# EAGLE board tentacle_module (EAGLE 7.1.0)
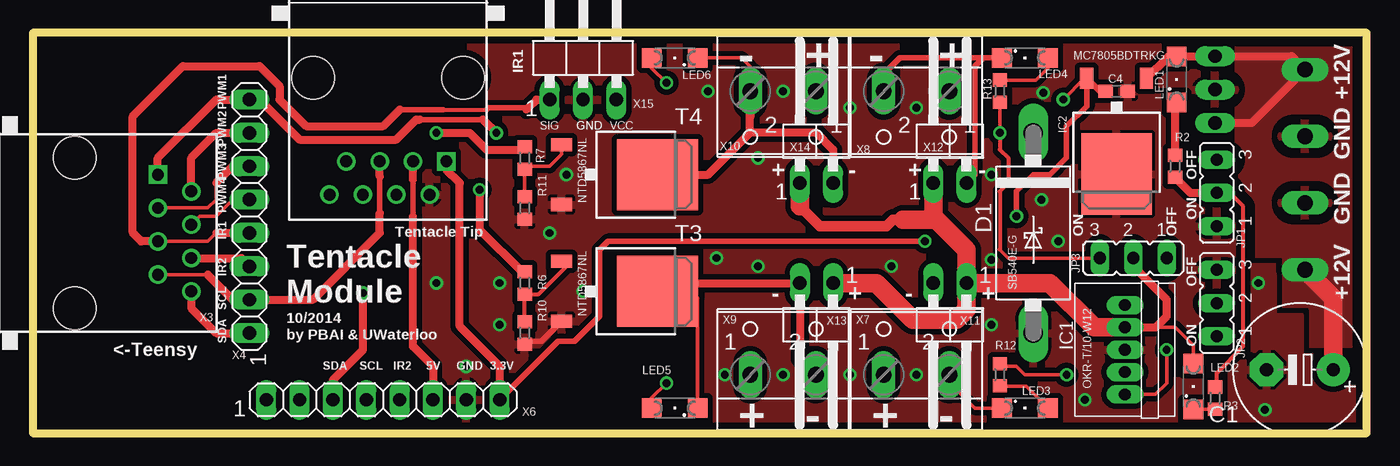
[diagram p0: board, top side]
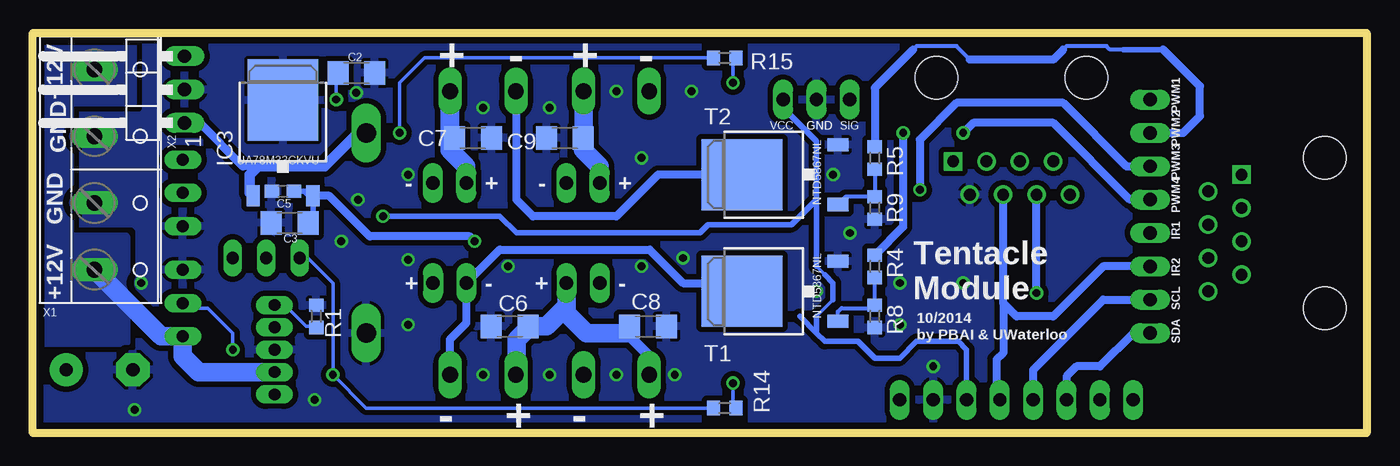
[diagram p1: board, bottom side, seen from below]

Size 101.6 x 30.48 mm. Coordinates in mm from the lower left corner, seen from the top.
Outline: 0,0 101.6,0 101.6,30.48 0,30.48 0,0
Copper layers (1*16): Top 0.035mm / dielectric 1.5mm / Bottom 0.035mm
Design rules "design_rule_settings *": minimum track width 10mil, minimum drill 20mil, track to track 10mil, track to pad 10mil, pad to pad 10mil, via to via 10mil, smd to smd 10mil, copper to edge 20mil, drill to drill 10mil, minimum pad ring 10mil, minimum via ring 8mil, stop-mask expansion 4mil, vias tented up to drill 0mil, thermal gap 10mil

## Footprints (pad centres in the part's own frame; a part is rotated, then mirrored left to right if it is on the bottom)
E5-10,5 = drill 1.016 pad 2.54: + -2.54,0 | drill 1.016 pad 2.54 octagon: - 2.54,0
C1206 = smd 1.6 x 1.8: 1 -1.4,0; 2 1.4,0
C0603 = smd 1.1 x 1: 1 -0.85,0; 2 0.85,0
DO201T15 = drill 1.499 long: A 7.62,0; C -7.62,0
OKR-C90 = drill 0.9 long: GND 0,0; ON/OFF 3.404,0; TRIM -3.404,0; VIN 1.702,0; VOUT -1.702,0
DPACK_3 = smd 1 x 1.6: 1 -2.28,-4.8; 3 2.28,-4.8 | smd 5.4 x 6.2: 4 0,2.5
DPACK = smd 1 x 1.6: 1 -2.28,-4.8; 3 2.28,-4.8 | smd 5.4 x 6.2: 2 0,2.5
JP2 = drill 0.914 long: 1 -2.54,0; 2 0,0; 3 2.54,0
SML1206 = smd 1.5 x 1.5: A 1.75,0; C -1.75,0
R0603 = smd 1 x 1.1: 1 -0.85,0; 2 0.85,0
W237-4P = drill 1.194 long: 1 -7.62,-0.635; 2 -2.54,-0.635; 3 2.54,-0.635; 4 7.62,-0.635
1X03/90 = drill 1.016 long: 1 -2.54,-3.81; 2 0,-3.81; 3 2.54,-3.81
RJ45-NO-SHIELD = drill 0.9 pad 1.4 square: 1 -4.445,6.35 | drill 0.9 pad 1.4: 2 -3.175,8.89; 3 -1.905,6.35; 4 -0.635,8.89; 5 0.635,6.35; 6 1.905,8.89; 7 3.175,6.35; 8 4.445,8.89 | hole 3.251: -5.715,0; 5.715,0
1X08 = drill 1.016 long: 1 -8.89,0; 2 -6.35,0; 3 -3.81,0; 4 -1.27,0; 5 1.27,0; 6 3.81,0; 7 6.35,0; 8 8.89,0
W237-102 = drill 1.194 long: 1 -2.5,-1.27; 2 2.5,-1.27
1X02/90 = drill 1.016 long: 1 -1.27,-3.81; 2 1.27,-3.81

## Placement (x,y rotation side)
C1  470uF  [E5-10,5]  96.52,4.83 180 top
C2  10uF  [C1206]  76.96,27.43 0 bottom
C3  10uF  [C1206]  82.04,16 180 bottom
C4  100nF  [C0603]  82.55,26.04 0 top
C5  100nF  [C0603]  82.55,18.41 180 bottom
C6  10uF  [C1206]  65.28,8.13 180 bottom
C7  10uF  [C1206]  68.07,22.48 0 bottom
C8  10uF  [C1206]  54.74,8.13 0 bottom
C9  10uF  [C1206]  61.09,22.48 180 bottom
D1  SB540E-G  [DO201T15]  76.2,15.24 270 top
IC1  OKR-T/10-W12  [OKR-C90]  83.19,6.35 270 top
IC2  MC7805BDTRKG  [DPACK_3]  82.55,22.23 180 top
IC3  UA78M33CKVU  [DPACK]  82.55,22.86 0 bottom
JP1  [JP2]  90.17,18.29 90 top
JP2  [JP2]  90.17,9.91 90 top
JP3  [JP2]  83.82,13.34 180 top
LED1  [SML1206]  87.12,26.92 90 top
LED2  [SML1206]  88.39,3.56 90 top
LED3  [SML1206]  75.56,1.91 0 top
LED4  [SML1206]  75.56,28.57 0 top
LED5  [SML1206]  48.9,1.91 180 top
LED6  [SML1206]  48.9,28.57 180 top
R1  267  [R0603]  80.01,8.89 270 bottom
R2  470  [R0603]  87,20.32 90 top
R3  470  [R0603]  90.04,2.67 270 top
R4  1K  [R0603]  37.47,12.7 270 bottom
R5  1K  [R0603]  37.47,20.95 270 bottom
R6  1K  [R0603]  37.47,11.43 270 top
R7  1K  [R0603]  37.47,20.95 270 top
R8  4.7K  [R0603]  37.47,8.89 90 bottom
R9  4.7K  [R0603]  37.47,17.14 90 bottom
R10  4.7K  [R0603]  37.47,7.62 90 top
R11  4.7K  [R0603]  37.47,17.14 90 top
R12  470  [R0603]  73.66,4.45 90 top
R13  470  [R0603]  73.66,26.04 270 top
R14  470  [R0603]  48.9,1.91 180 bottom
R15  470  [R0603]  48.9,28.57 180 bottom
T1  NTD5867NL  [DPACK]  45.09,10.79 90 bottom
T2  NTD5867NL  [DPACK]  45.09,19.68 90 bottom
T3  NTD5867NL  [DPACK]  45.09,10.79 270 top
T4  NTD5867NL  [DPACK]  45.09,19.68 270 top
X1  [W237-4P]  96.27,20.07 270 bottom
X2  [1X03/90]  93.85,26.16 90 bottom
X3  RJ45-8X  [RJ45-NO-SHIELD]  3.17,15.24 270 top
X4  [1X08]  16.51,16.51 90 top
X5  RJ45-8X  [RJ45-NO-SHIELD]  27.05,27.05 180 top
X6  [1X08]  26.67,2.54 0 top
X7  [W237-102]  67.31,5.71 0 top
X8  [W237-102]  67.31,24.77 180 top
X9  [W237-102]  57.15,5.71 0 top
X10  [W237-102]  57.15,24.77 180 top
X11  [1X02/90]  69.85,7.62 180 top
X12  [1X02/90]  69.85,22.86 0 top
X13  [1X02/90]  59.69,7.62 180 top
X14  [1X02/90]  59.69,22.86 0 top
X15  [1X03/90]  41.91,29.21 0 top

## Library data of the parts
C1-C9 = rcl
D1 IC1-IC3 R1-R15 T1-T4 X2 X4 X6 X11-X15 = CBLA_Test_bed_Library
JP1-JP3 = jumper
LED1-LED6 = led
X1 = con-wago-508; OC_FARNELL: unknown; OC_NEWARK: unknown
X3 X5 = CBLA_Test_bed_Library; MPN: RJ45-8X; OC_FARNELL: unknown; OC_NEWARK: 16R6101
X7-X10 = con-wago-500; MPN: 237-102; OC_FARNELL: unknown; OC_NEWARK: 70K9898

## Nets
5V_ENABLE: IC1.ON/OFF JP2.2
+3.3V: C3.1 C5.1 IC3.3 X5.1 X6.8
+5V: C2.1 C4.1 IC2.3 X5.3 X6.6 X15.3
+5V_HI-PWR: C6.1 C7.1 C8.1 C9.1 IC1.VOUT JP3.2 LED2.A X7.1 X8.1 X9.1 X10.1 X11.1 X12.1 X13.1 X14.1
+12V: C1.+ D1.C IC1.VIN IC2.1 IC3.1 JP2.1 LED1.A X1.1 X1.4 X2.1 X2.3
GND: C1.- C2.2 C3.2 C4.2 C5.2 C6.2 C7.2 C8.2 C9.2 D1.A IC1.GND IC2.4 IC3.2 JP1.1 JP2.3 R1.1 R8.1 R9.1 R10.1 R11.1 T1.3 T2.3 T3.3 T4.3 X1.2 X1.3 X2.2 X5.2 X6.7 X15.2
IR1: X3.5 X4.4 X15.1
IR2: X3.6 X4.3 X5.4 X6.5
N$1: R5.2 R9.2 T2.1
N$2: R6.2 R10.2 T3.1
N$3: R7.2 R11.2 T4.1
N$4: R4.2 R8.2 T1.1
N$5: LED3.A R12.1
N$6: IC1.TRIM R1.2
N$7: LED2.C R3.2
N$10: LED1.C R2.2
N$12: LED4.A R13.1
N$13: LED5.A R14.1
N$14: LED6.A R15.1
PWM1: R4.1 X3.1 X4.8
PWM2: R5.1 X3.2 X4.7
PWM3: R6.1 X3.3 X4.6
PWM4: R7.1 X3.4 X4.5
PWR_LED_GND: JP1.2 R2.1 R3.1
SCL: X3.7 X4.2 X5.5 X6.4
SDA: X3.8 X4.1 X5.6 X6.3
SMA1_OUT-: LED3.C T1.2 X7.2 X11.2
SMA2_OUT-: LED4.C T2.2 X8.2 X12.2
SMA3_OUT-: LED5.C T3.2 X9.2 X13.2
SMA4_OUT-: LED6.C T4.2 X10.2 X14.2
TEST_LED_V+: JP3.3 R12.2 R13.2 R14.2 R15.2

## Tracks (layer width: path | path; a pad name or v marks a point on that pad's centre or on a via)
5V_ENABLE  (via drill 0.6)
  Top 0.254: IC1.ON/OFF 85.5,2.95 86.36,3.81 v86.36,6.35
  Bottom 0.254: v86.36,6.35 86.36,7.62 88.27,9.53 89.79,9.53 JP2.2
+3.3V  (via drill 0.6)
  Top 0.406: v67.94,14.61 43.81,14.61 43.18,13.97 43.18,8.89 41.27,6.99 40.01,6.99 X6.8
  Top 0.61: X6.8 35.56,5.08 32.51,8.13 32.51,19.05 31.5,20.07 X5.1
  Bottom 0.406: 80.01,17.78 80.27,18.04 IC3.3 80.62,18.41 C5.1 80.9,18.41 80.26,17.78 80.26,16.38 C3.1
  Bottom 0.61: v67.94,14.61 68.33,14.99 75.95,14.99 79.02,18.06 IC3.3
+5V  (via drill 0.6)
  Top 0.254: IC2.3 80.11,27.02 v78.49,25.4
  Top 0.406: v74.93,16.51 74.93,18.41 76.2,19.68 77.47,19.68 78.74,20.95 78.74,23.37 80.27,24.9 IC2.3 81.26,26.04 C4.1 | 28.96,16.51 28.96,19.3
  Top 0.61: X6.6 30.48,5.08 28.96,6.6 28.96,16.51 | 28.96,19.3 X5.3
  Bottom 0.254: 41.91,12.7 41.27,12.06 | 40.64,10.16 41.91,8.89 | v78.49,25.4 78.49,27.31 C2.1
  Bottom 0.406: v74.93,16.51 66.04,16.51 64.77,15.24 50.8,15.24 50.16,15.88 43.81,15.88 41.91,17.78 | 30.48,3.81 X6.6 30.48,6.35 31.11,6.99 34.29,6.99 35.56,5.71 37.47,5.71 38.73,6.99 41.27,6.99 41.91,7.62 | 41.91,7.62 43.18,8.89 | 41.91,17.78 41.91,12.7 | 41.27,12.06 40.64,11.43 40.64,10.16 | 41.91,8.89 41.91,7.62 | X15.3 44.45,24.77 41.91,22.23 41.91,17.78
+5V_HI-PWR
  Top 0.254: IC1.VOUT 87.04,8.05 88.39,6.7 LED2.A
  Top 0.61: IC1.VOUT 85.52,8.05 86.36,8.89 86.36,10.16 83.82,12.7 JP3.2
  Top 0.813: 58.42,17.27 59.94,15.75 65.02,15.75 65.53,16.26 66.29,16.26
  Top 1.422: IC1.VOUT 80.85,8.05 77.47,11.43 X11.1 | X11.1 71.12,13.97 68.83,16.26 | 68.83,16.26 68.58,16.51 X12.1 | X14.1 58.42,17.27 | 66.29,16.26 68.83,16.26 | X13.1 64.26,11.43 67.06,8.64 70.36,8.64 71.12,9.4 X11.1
  Bottom 0.61: 64.01,8 C6.1
  Bottom 0.813: X9.1 54.65,5.88 56.39,7.62 56.14,7.87 C8.1
  Bottom 1.422: C7.1 69.81,22.82 X8.1 69.85,26 69.85,21.59 68.58,20.32 X12.1 | X14.1 58.42,20.32 59.69,21.59 C9.1 59.65,22.52 X10.1 | X13.1 60.96,9.65 | 60.96,9.65 62.48,8.13 C6.1 | 64.01,8 64.01,7.87 64.77,7.11 64.77,4.49 X7.1 | 60.96,9.65 60.96,9.14 59.44,7.62 56.39,7.62
+12V
  Top 0.61: 84.83,26.93 IC2.1 86.48,28.67 LED1.A 90.02,28.67 X2.3 95.89,28.7 X1.1 92.84,23.62 X2.1
  Top 1.422: C1.+ 99.06,10.29 X1.4
  Bottom 0.406: IC3.1 85.09,18.32
  Bottom 0.61: 84.45,20.32 85.6,20.32 88.9,23.62 X2.1
  Bottom 0.813: D1.C 76.83,22.86 79.38,20.32 84.45,20.32 85.09,19.68 85.09,18.32
  Bottom 1.422: IC1.VIN 88.98,4.65 90.17,5.84 JP2.1 91.82,7.37 X1.4
  pour Top (isolate 0.762, rank 2, no thermals, hatched): 91.69,30.23 101.6,30.23 101.85,6.6 91.69,6.6
  pour Bottom (isolate 0.61, no thermals, hatched): 93.98,29.97 93.98,25.15 98.81,25.15 98.81,14.99 94.49,14.99 94.49,10.16 94.49,6.86 100.84,6.86 100.84,29.97
GND  (via drill 0.6)
  Top 0.406: R10.1 37.68,6.99 38.73,6.99 40.27,8.52 T3.3
  other vias: 39.37,15.24 40.64,19.68 52.7,4.45 35.56,11.43 51.44,26.04 73.03,8.26 78.11,14.61 67.31,24.77 67.31,4.45 62.23,4.45 57.15,4.45 33.02,5.08 41.91,10.79 55.24,12.7 52.07,13.34 35.56,8.26 55.24,20.95 76.83,17.78 62.23,24.77 57.15,26.04 65.41,12.7 73.03,13.21 73.03,19.68 76.96,25.91 30.73,11.43 93.34,11.43 80.14,2.54 93.85,1.78
  pour Top (isolate 0.406, rank 3, hatched): 0,30.48 0,0 101.6,0 101.6,1.27 101.6,30.48
  pour Bottom (isolate 0.406, rank 3, hatched): 0,30.48 0,0 101.6,0 101.6,30.48
  pour Bottom (isolate 0.61, rank 2, no thermals, hatched): 93.98,24.64 93.98,15.49 99.82,15.49 99.82,24.64
  pour Top (isolate 0.61, hatched): 92.71,12.45 94.23,12.45 94.23,11.94 94.23,8.64 96.27,8.64 96.27,4.32 96.27,2.79 92.2,2.79 92.2,12.45
IR1
  Top 0.254: X3.5 13.34,14.61 13.97,15.24
  Top 0.305: 31.24,24.64 34.54,24.64
  Top 0.406: 27.94,24.64 31.24,24.64 | 34.54,24.64 34.67,24.77 37.72,24.77
  Top 0.61: 13.97,15.24 X4.4 | X3.5 8.26,14.61 7.62,15.24 7.62,24.13 11.43,27.94 17.27,27.94 18.8,26.42 18.8,25.4 20.83,23.37 26.67,23.37 27.94,24.64 | 37.59,24.64 37.72,24.77 38.35,25.4 X15.1
IR2
  Top 0.61: X3.6 15.88,13.34 X4.3
  Bottom 0.61: X4.3 20.07,12.7 23.88,8.89 26.67,8.89 27.69,9.91 | 27.69,9.91 X5.4 | 27.69,2.79 X6.5 28.19,2.79 28.19,5.59 27.69,6.1 27.69,9.91
N$1
  Bottom 0.305: R5.2 R9.2 39.7,18 T2.1
N$2
  Top 0.305: T3.1 40.64,12.72 40.64,12.7 38.52,10.58 R6.2 R10.2
N$3
  Top 0.254: R11.2 R7.2 37.68,20.32 39.37,20.32 40.28,21.23 T4.1
N$4
  Bottom 0.305: T1.1 40.28,9.24 40.01,9.53 37.68,9.53 R8.2 R4.2
N$5
  Top 0.254: 77.22,2.03 75.69,3.56 73.66,3.56 R12.1
  Top 0.406: 77.22,2.03 77.22,2 LED3.A
N$6
  Bottom 0.254: R1.2 80.01,8.13 80.77,8.13 82.4,9.75 IC1.TRIM
N$7
  Top 0.254: LED2.C 90.03,1.81 R3.2
N$10
  Top 0.61: LED1.C 87,25.05 R2.2
N$12
  Top 0.254: R13.1 76.42,26.89 77.47,27.94 77.47,28.42 LED4.A
N$13  (via drill 0.6)
  Top 0.254: LED5.A 47.15,2.69 v48.26,3.81
  Bottom 0.254: v48.26,3.81 48.26,2.12 R14.1
N$14  (via drill 0.6)
  Top 0.254: LED6.A 47.15,27.79 v48.26,26.67
  Bottom 0.254: v48.26,26.67 48.26,28.36 R15.1
PWM1  (via drill 0.6)
  Top 0.406: 29.46,23.88 34.29,23.88
  Top 0.61: X3.1 9.53,20.95 13.97,25.4 X4.8 17.27,25.4 20.32,22.35 27.69,22.35 29.21,23.88 29.46,23.88 | 34.29,23.88 v35.31,22.86
  Bottom 0.61: v35.31,22.86 35.31,15.71 R4.1
PWM2
  Top 0.61: X3.2 12.06,20.95 13.97,22.86 X4.7
  Bottom 0.305: 30.23,28.45 31.24,29.46 34.29,29.46 34.54,29.21 | 18.54,29.21 19.56,29.21 19.81,29.46 22.86,29.46 23.11,29.21
  Bottom 0.406: 15.49,29.21 18.54,29.21
  Bottom 0.61: X4.7 13.97,22.86 12.7,24.13 12.7,26.42 15.49,29.21 | R5.1 37.47,26.29 34.54,29.21 | 30.23,28.45 23.88,28.45 23.11,29.21
PWM3  (via drill 0.6)
  Top 0.254: X3.3 13.34,17.14 13.97,17.78 13.97,19.05
  Top 0.61: X4.6 15.24,20.32 13.97,19.05 | R6.1 37.25,12.28 34.04,15.49 v34.04,18.54
  Bottom 0.61: v34.04,18.54 34.04,22.35 31.24,25.15 23.11,25.15 18.29,20.32 X4.6
PWM4  (via drill 0.6)
  Top 0.254: X3.4 12.7,16.51 13.97,16.51 15.24,17.78 X4.5
  Top 0.61: R7.1 37.25,21.59 34.54,21.59 33.27,22.86 v30.73,22.86
  Bottom 0.61: X4.5 18.03,17.78 23.88,23.62 29.97,23.62 v30.73,22.86
PWR_LED_GND
  Top 0.254: 90.17,3.64 R3.1
  Top 0.305: 90.17,3.64 90.17,4.57 92.2,6.6 92.2,17.27 91.19,18.29 JP1.2
  Top 0.61: R2.1 88.18,18.29 JP1.2
SCL
  Top 0.254: 13.34,12.06 X3.7
  Top 0.406: 26.42,16.76 26.42,19.56
  Top 0.61: 13.34,12.06 15.24,10.16 X4.2 21.34,10.16 26.42,15.24 26.42,16.76 | 26.42,19.56 X5.5
  Bottom 0.61: X6.4 25.4,4.83 20.07,10.16 X4.2
SDA  (via drill 0.6)
  Top 0.61: X3.8 12.06,9.53 13.97,7.62 X4.1 | v25.15,10.67 25.15,6.35 22.86,4.06 X6.3
  Bottom 0.61: v25.15,10.67 X5.6 | X4.1 17.78,7.62 20.32,5.08 22.1,5.08 22.86,4.32 X6.3
SMA1_OUT-
  Top 0.254: X7.2 69.81,3.85 71.75,1.91 LED3.C
  Bottom 0.305: 49.53,11.43 48.22,11.43 T1.2
  Bottom 0.61: 49.53,11.43 52.07,11.43 54.61,13.97 66.04,13.97 X11.2 68.58,8.38 69.85,7.11 69.85,4.49 X7.2
SMA2_OUT-
  Top 0.254: 73.03,28.57 LED4.C
  Top 0.406: X12.2 71.75,19.68 71.75,27.94 72.39,28.57 | 72.39,28.57 73.03,28.57 | 72.39,28.57 66.04,28.57 64.81,27.34 X8.2
  Bottom 0.61: T2.2 53.98,19.68 57.15,16.51 63.5,16.51 64.77,17.78 64.77,26 X8.2
SMA3_OUT-
  Top 0.254: LED5.C 50.65,10.31 49.53,11.43
  Top 0.61: X9.2 58.42,5.67 X13.2 49.53,11.43 48.22,11.43 T3.2
SMA4_OUT-
  Top 0.254: LED6.C 53.98,28.57 54.61,27.94 54.61,25.44 54.65,25.4
  Top 0.61: X10.2 54.65,25.4 54.65,24.09 | X14.2 60.96,21.59 59.69,22.86 54.61,22.86 | T4.2 51.44,19.68 54.61,22.86 | 54.61,22.86 54.61,25.44
TEST_LED_V+  (via drill 0.6)
  Top 0.254: v78.74,4.45 75.56,4.45 74.93,5.08 73.88,5.08 | R13.2 v73.66,22.86 | 73.66,13.97 74.3,13.34 JP3.3
  Top 0.305: v73.66,22.86 73.66,21.59 74.3,20.95 74.3,19.05 73.66,18.41 73.66,13.97
  Top 0.406: 73.88,5.08 R12.2
  Bottom 0.254: JP3.3 80.64,13.34 78.74,11.43 v78.74,4.45 76.2,1.91 R14.2 | R15.2 71.75,28.57 73.66,26.67 v73.66,22.86

## Text on the board
tPlace: - | - | + | + | - | - | + | + | MC7805BDTRKG | IR1 | PWM1 | +12V | SIG | GND | GND | VCC | PWM2 | GND | PWM3 | + | - | + | - | OFF | NTD5867NL | PWM4 | Tentacle Tip | ON | GND | IR1 | ON | OFF | IR2 | SB540E-G | OFF | Tentacle / Module | - | + | - | + | +12V | SCL | NTD5867NL | 10/2014 | SDA | by PBAI & UWaterloo | ON | <-Teensy | SDA | SCL | IR2 | 5V | GND | 3.3V | + | - | + | -
bPlace: - | + | - | + | +12V | PWM1 | SIG | GND | GND | VCC | PWM2 | NTD5867NL | UA78M33CKVU | GND | PWM3 | + | - | + | - | PWM4 | GND | IR1 | NTD5867NL | IR2 | - | + | - | + | Tentacle / Module | +12V | SCL | 10/2014 | SDA | by PBAI & UWaterloo | + | - | + | -